# Altium PCB Redstone.PcbDoc
Units mm, origin at the board's own origin, x right, y up, seen from the top; angles counter-clockwise.
Board outline 35 x 35 mm, 2 copper layers (Top Layer, Bottom Layer), stack 1.571 mm thick; 51 components, 32 nets, 206 pads, 0 vias.
Unrouted connection lines stored in the file: 119.
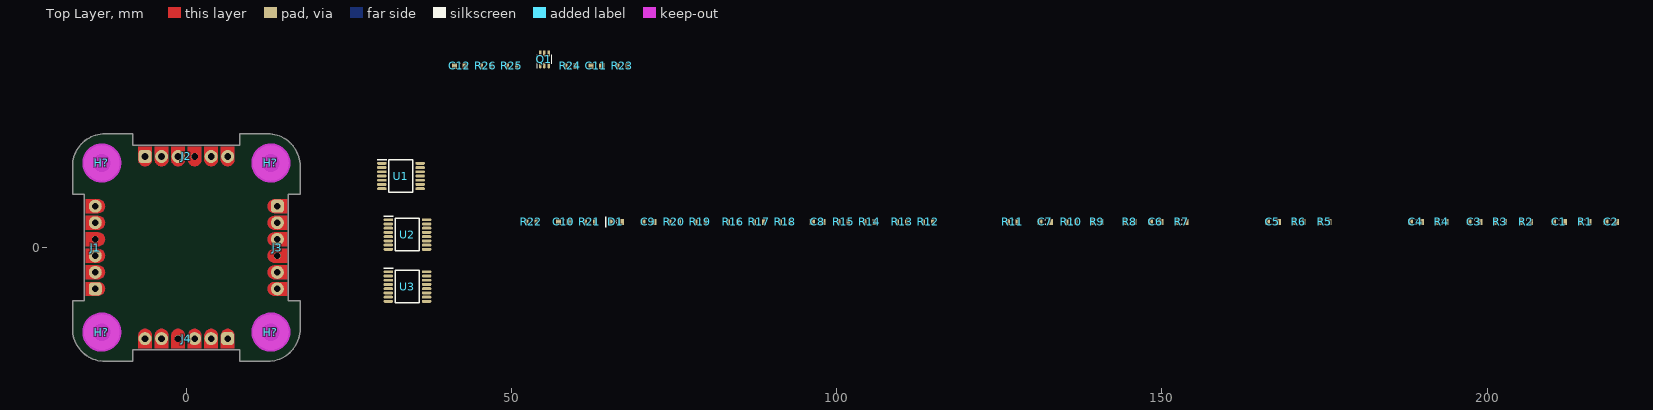
[diagram p0: Top Layer view]
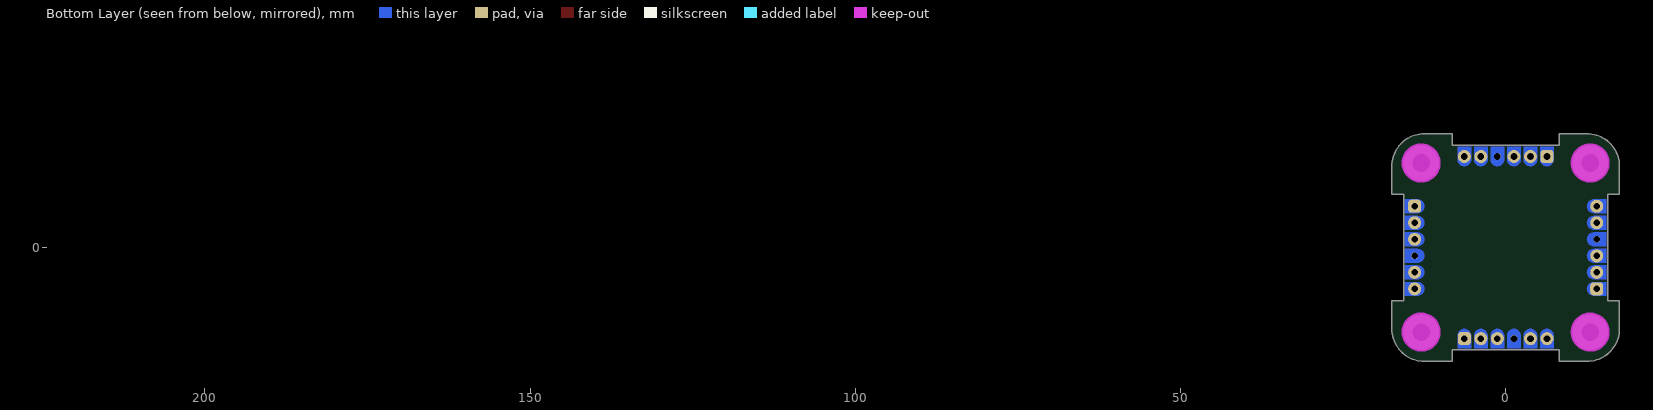
[diagram p1: Bottom Layer view, seen from below]

## Layer stack, top to bottom
Top Solder: solder mask 0.0102, Solder Resist, Dk 3.5
Top Layer: signal copper 0.0356
Dielectric 1: dielectric 1.5, FR-4, Dk 4.8
Bottom Layer: signal copper 0.0356
Bottom Solder: solder mask 0.0102, Solder Resist, Dk 3.5

## Board outline
-17.5,-12.5 ccw(c-12.5,-12.5) -12.5,-17.5 -8.2,-17.5 -8.2,-15.7 8.2,-15.7 8.2,-17.5 12.5,-17.5 ccw(c12.5,-12.5) 17.5,-12.5 17.5,-8.2 15.7,-8.2 15.7,8.2 17.5,8.2 17.5,12.5 ccw(c12.5,12.5) 12.5,17.5 8.2,17.5 8.2,15.7 -8.2,15.7 -8.2,17.5 -12.5,17.5 ccw(c-12.5,12.5) -17.5,12.5 -17.5,8.2 -15.7,8.2 -15.7,-8.2 -17.5,-8.2

## Design rules (kind name [scope] priority, off if disabled: settings)
AcuteAngle [All] p1: minimum=4.50000000000000E+0001 checktracksonly=FALSE
BoardOutlineClearance [All] p1: gap=0.2 ignorepadtopadclearanceinfootprint=FALSE except(0: Arc-SplitContinuation Track-SplitContinuation SMDPad-SplitContinuation THPad-SplitContinuation Via-SplitContinuation Fill-SplitContinuation Poly-SplitContinuation Region-SplitContinuation Text-SplitContinuation)
Clearance [All] p1: gap=0.254 ignorepadtopadclearanceinfootprint=FALSE except(0: Arc-Hole Track-Hole SMDPad-Hole THPad-Hole Via-Hole Fill-Hole Poly-Hole Region-Hole Text-Hole; 0.09: Arc-Arc Arc-Track Track-Track; 0.1: Arc-SMDPad Arc-Text Track-SMDPad Track-Text SMDPad-Text THPad-THPad THPad-Text Via-Text Fill-Text Poly-Text Region-Text Text-Text; 0.127: SMDPad-SMDPad SMDPad-Via; 0.15: Arc-Via Track-Via THPad-Via; 0.2: Arc-THPad Track-THPad SMDPad-THPad)
DiffPairsRouting 0,1 [All] p1: maxlimit=0.127 minlimit=0.127 mostfreqgap=0.127 toplayer_minwidth=0.123 toplayer_maxwidth=0.123 toplayer_prefwidth=0.123 bottomlayer_minwidth=0.123 bottomlayer_maxwidth=0.123 bottomlayer_prefwidth=0.123 impedanceprofiledriven=TRUE maxuncoupledlength=12.7
HoleSize [All] p1: absolutevalues=TRUE maxlimit=6.3 minlimit=0.1 maxpercent=80.000 minpercent=20.000
HoleToHoleClearance [All] p1: gap=0.5 allowstackedmicrovias=TRUE
MinimumAnnularRing [All] p1: minimumring=0.05
MinimumSolderMaskSliver [All] p1: minsoldermaskwidth=0.2
PlaneConnect [All] p1: planeconnectstyle=Direct reliefexpansion=0.508 reliefentries=4 reliefconductorwidth=0.254 reliefairgap=0.254
PolygonConnect PolygonConnectNoThermal [Name Like '*_NOTR'] p1: connectstyle=Direct reliefconductorwidth=0.254 reliefentries=4 polygonreliefangle="90 Angle" airgapwidth=0.254
PolygonConnect [All] p2: thpad.connectstyle=Relief thpad.reliefconductorwidth=0.254 thpad.reliefentries=4 thpad.polygonreliefangle="90 Angle" thpad.airgapwidth=0.254 smdpad.connectstyle=Relief smdpad.reliefconductorwidth=0.254 smdpad.reliefentries=4 smdpad.polygonreliefangle="90 Angle" smdpad.airgapwidth=0.254 via.connectstyle=Direct via.reliefconductorwidth=0.254 via.reliefentries=4 via.polygonreliefangle="90 Angle" via.airgapwidth=0.254
RoutingVias [All] p1: holewidth=0.15 width=0.25 viastyle="Through Hole" minholewidth=0.1 minwidth=0.2 maxholewidth=6.3 maxwidth=6.4
SolderMaskExpansion [IsVia] p1: expansion=0.102 istentingtop=TRUE
SupplyNets "Schematic Supply Nets_2" [InNet('5V')] p1: voltage=0.000
SupplyNets "Schematic Supply Nets_1" [InNet('VCC')] p2: voltage=0.000
SupplyNets "Schematic Supply Nets" [InNet('GND')] p3: voltage=0.000
UnRoutedNet [All] p1: checkbadconnections=TRUE
Width [All] p1: maxlimit=6.3 minlimit=0.1 preferedwidth=0.5
24 further rules are at their usual default settings.

## Classes and differential pairs
component class Redstone: C1 C2 C3 C4 C5 C6 C7 C8 C9 C10 C11 C12 D1 H? J1 J2 J3 J4 Q1 R1 R2 R3 R4 R5 R6 R7 R8 R9 R10 R11 R12 R13 R14 R15 R16 R17 R18 R19 R20 R21 R22 R23 R24 R25 R26 U1 U2 U3

## Components (designator, comment, footprint, x,y, rotation, side; value= is the part's Value field where it differs from the comment)
C1 "1uF" CAP0603 211.055,3.93 r0 top
C2 "100nF" CAP0603 219.055,3.93 r0 top
C3 "100nF" CAP0603 198.055,3.93 r0 top
C4 "100nF" CAP0603 189.055,3.93 r0 top
C5 "100nF" CAP0603 167.055,3.93 r0 top
C6 "1uF" CAP0603 149.055,3.93 r0 top
C7 "100nF" CAP0603 132.055,3.93 r0 top
C8 "1uF" CAP0603 97.055,3.93 r0 top
C9 "100nF" CAP0603 71.055,3.93 r0 top
C10 "1uF" CAP0603 58.055,3.93 r0 top
C11 "100nF" CAP0603 63.055,27.93 r0 top
C12 "100nF" CAP0603 42.055,27.93 r0 top
D1 "LTST-C190KRKT" LED0603 66.055,3.93 r0 top
H? "MH" MOUNTING_HOLE_M2.5 13,13 r0 top
H? "MH" MOUNTING_HOLE_M2.5 13,-13 r0 top
H? "MH" MOUNTING_HOLE_M2.5 -13,13 r0 top
H? "MH" MOUNTING_HOLE_M2.5 -13,-13 r0 top
J1 "Connector" CONNECTOR -14,0 r90 top
J2 "Connector" CONNECTOR 0,14 r0 top
J3 "Connector" CONNECTOR 14,0 r270 top
J4 "Connector" CONNECTOR 0,-14 r180 top
Q1 "SSM6N7002" SOT-363-6 55.055,28.93 r0 top
R1 "100R" RES0603 215.055,3.93 r0 top
R2 "100R" RES0603 206.055,3.93 r0 top
R3 "100K" RES0603 202.055,3.93 r0 top
R4 "240K" RES0603 193.055,3.93 r0 top
R5 "100K" RES0603 175.055,3.93 r0 top
R6 "10K" RES0603 171.055,3.93 r0 top
R7 "100R" RES0603 153.055,3.93 r0 top
R8 "100R" RES0603 145.055,3.93 r0 top
R9 "10K" RES0603 140.055,3.93 r0 top
R10 "100K" RES0603 136.055,3.93 r0 top
R11 "100K" RES0603 127.055,3.93 r0 top
R12 "10K" RES0603 114.055,3.93 r0 top
R13 "10K" RES0603 110.055,3.93 r0 top
R14 "10K" RES0603 105.055,3.93 r0 top
R15 "100R" RES0603 101.055,3.93 r0 top
R16 "100R" RES0603 84.055,3.93 r0 top
R17 "10K" RES0603 88.055,3.93 r0 top
R18 "10K" RES0603 92.055,3.93 r0 top
R19 "100K" RES0603 79.055,3.93 r0 top
R20 "100K" RES0603 75.055,3.93 r0 top
R21 "100R" RES0603 62.055,3.93 r0 top
R22 "100R" RES0603 53.055,3.93 r0 top
R23 "100K" RES0603 67.055,27.93 r0 top
R24 "1K" RES0603 59.055,27.93 r0 top
R25 "510K" RES0603 50.055,27.93 r0 top
R26 "10K" RES0603 46.055,27.93 r0 top
U1 "LM324B" TSSOP_14P 33,11 r0 top
U2 "74HC4053" TSSOP_16P 34,2 r0 top
U3 "LM339B" TSSOP_16P 34,-6 r0 top

## Footprints (in the part's own frame and the unit in brackets; to place one, negate y for a bottom-side part, rotate by r counter-clockwise, add the part's x,y. Pads: shape width x height; smd on the part's side, far side on the other; paste and mask are expansions set on the pad)
CAP0603 [mm] "Chip Capacitor, 2-Leads, Body 1,60x0,80mm, IPC Medium Density"
  rect 0.8x0.95 smd: 1(-0.825,0) 2(0.825,0)
  silkscreen extent -0.05,-0.38 0.05,0.38, body extent -0.8,-0.4 0.8,0.4, height 0.8
CONNECTOR [mil]
  rrect50% 78.74x78.74 hole 40.16 mask+0: 1(-250,0)
  round 1 smd: 1(-250,0) 2(-150,0) 3(-50,0) 4(50,0) 5(150,0) 6(250,0)
  round 1 smd far side: 1(-250,0) 2(-150,0) 3(-50,0) 4(50,0) 5(150,0) 6(250,0)
  round 78.74 hole 40.16 mask+0: 2(-150,0) 3(-50,0) 5(150,0) 6(250,0)
  round 41.16 hole 40.16 mask+0: 4(50,0)
  Top Layer region: 50,-39.37 34.93,-36.37 22.16,-27.84 13.63,-15.07 10.63,0 10.63,0 13.63,15.07 22.16,27.84 34.93,36.37 50,39.37 50,39.37 65.07,36.37 77.84,27.84 86.37,15.07 89.37,0 89.37,0 86.37,-15.07 77.84,-27.84 65.07,-36.37 50,-39.37
  Top Layer region: -250,-59.06 -265.82,-55.91 -279.23,-46.95 -288.19,-33.54 -291.34,-17.72 -291.34,-17.72 -291.34,59.06 -208.66,59.06 -208.66,-17.72 -211.81,-33.54 -220.77,-46.95 -234.18,-55.91 -250,-59.06
  Top Layer region: -150,-59.06 -165.82,-55.91 -179.23,-46.95 -188.19,-33.54 -191.34,-17.72 -191.34,-17.72 -191.34,59.06 -108.66,59.06 -108.66,-17.72 -111.81,-33.54 -120.77,-46.95 -134.18,-55.91 -150,-59.06
  Top Layer region: -50,-59.06 -65.82,-55.91 -79.23,-46.95 -88.19,-33.54 -91.34,-17.72 -91.34,-17.72 -91.34,59.06 -8.66,59.06 -8.66,-17.72 -11.81,-33.54 -20.77,-46.95 -34.18,-55.91 -50,-59.06
  Top Layer region: 50,-59.06 34.18,-55.91 20.77,-46.95 11.81,-33.54 8.66,-17.72 8.66,-17.72 8.66,59.06 91.34,59.06 91.34,-17.72 88.19,-33.54 79.23,-46.95 65.82,-55.91 50,-59.06
  Top Layer region: 150,-59.06 134.18,-55.91 120.77,-46.95 111.81,-33.54 108.66,-17.72 108.66,-17.72 108.66,59.06 191.34,59.06 191.34,-17.72 188.19,-33.54 179.23,-46.95 165.82,-55.91 150,-59.06
  Top Layer region: 250,-59.06 234.18,-55.91 220.77,-46.95 211.81,-33.54 208.66,-17.72 208.66,-17.72 208.66,59.06 291.34,59.06 291.34,-17.72 288.19,-33.54 279.23,-46.95 265.82,-55.91 250,-59.06
  Bottom Layer region: 50,-39.37 34.93,-36.37 22.16,-27.84 13.63,-15.07 10.63,0 10.63,0 13.63,15.07 22.16,27.84 34.93,36.37 50,39.37 50,39.37 65.07,36.37 77.84,27.84 86.37,15.07 89.37,0 89.37,0 86.37,-15.07 77.84,-27.84 65.07,-36.37 50,-39.37
  Bottom Layer region: -250,-59.06 -234.18,-55.91 -220.77,-46.95 -211.81,-33.54 -208.66,-17.72 -208.66,-17.72 -208.66,59.06 -291.34,59.06 -291.34,-17.72 -288.19,-33.54 -279.23,-46.95 -265.82,-55.91 -250,-59.06
  Bottom Layer region: -150,-59.06 -134.18,-55.91 -120.77,-46.95 -111.81,-33.54 -108.66,-17.72 -108.66,-17.72 -108.66,59.06 -191.34,59.06 -191.34,-17.72 -188.19,-33.54 -179.23,-46.95 -165.82,-55.91 -150,-59.06
  Bottom Layer region: -50,-59.06 -34.18,-55.91 -20.77,-46.95 -11.81,-33.54 -8.66,-17.72 -8.66,-17.72 -8.66,59.06 -91.34,59.06 -91.34,-17.72 -88.19,-33.54 -79.23,-46.95 -65.82,-55.91 -50,-59.06
  Bottom Layer region: 50,-59.06 65.82,-55.91 79.23,-46.95 88.19,-33.54 91.34,-17.72 91.34,-17.72 91.34,59.06 8.66,59.06 8.66,-17.72 11.81,-33.54 20.77,-46.95 34.18,-55.91 50,-59.06
  Bottom Layer region: 150,-59.06 165.82,-55.91 179.23,-46.95 188.19,-33.54 191.34,-17.72 191.34,-17.72 191.34,59.06 108.66,59.06 108.66,-17.72 111.81,-33.54 120.77,-46.95 134.18,-55.91 150,-59.06
  Bottom Layer region: 250,-59.06 265.82,-55.91 279.23,-46.95 288.19,-33.54 291.34,-17.72 291.34,-17.72 291.34,59.06 208.66,59.06 208.66,-17.72 211.81,-33.54 220.77,-46.95 234.18,-55.91 250,-59.06
  body extent -394,63 394,327, height 126
LED0603 [mm]
  rect 0.9x0.95 smd: A(0.8,0) C(-0.8,0)
  silkscreen extent -1.6,-0.82 0.14,0.82, body extent -0.83,-0.4 0.77,0.4, height 0.8
MOUNTING_HOLE_M2.5 [mm] "Mounting hole for M2.5 screws."
  round 5.5 hole 2.7: MH(0,0)
  Keep-Out Layer circle w3: c0,0 r1.5
RES0603 [mm] "Chip Resistor, 2-Leads, Body 1,55x0,85mm, IPC Medium Density"
  rect 0.55x0.9 smd: 1(-0.725,0) 2(0.725,0)
  silkscreen extent -0.05,-0.35 0.05,0.35, body extent -0.77,-0.43 0.77,0.43, height 0.45
SOT-363-6 [mm] "Small Outline Transistor (SOT23), 0.65 mm pitch; 6 pin, 2.00 mm L X 1.25 mm W X 1.10 mm H body"
  rrect51% 0.39x0.89 smd: 1(-0.65,-0.92) 2(0,-0.92) 3(0.65,-0.92) 4(0.65,0.92) 5(0,0.92) 6(-0.65,0.92)
  silkscreen extent -1.1,-1.4 1.1,0.68, body extent -1,-1.05 1,1.05, height 1.1
TSSOP_14P [mm]
  oval 1.475x0.45 smd: 1(-2.938,1.95) 2(-2.938,1.3) 3(-2.938,0.65) 4(-2.938,0) 5(-2.938,-0.65) 6(-2.938,-1.3) 7(-2.938,-1.95) 8(2.938,-1.95) 9(2.938,-1.3) 10(2.938,-0.65) 11(2.938,0) 12(2.938,0.65) 13(2.938,1.3) 14(2.938,1.95)
  silkscreen extent -3.67,-2.5 1.85,2.52, body extent -3.2,-2.5 3.2,2.5, height 1.13
TSSOP_16P [mm]
  oval 1.475x0.45 smd: 1(-2.938,2.275) 2(-2.938,1.625) 3(-2.938,0.975) 4(-2.938,0.325) 5(-2.938,-0.325) 6(-2.938,-0.975) 7(-2.938,-1.625) 8(-2.938,-2.275) 9(2.938,-2.275) 10(2.938,-1.625) 11(2.938,-0.975) 12(2.938,-0.325) 13(2.938,0.325) 14(2.938,0.975) 15(2.938,1.625) 16(2.938,2.275)
  silkscreen extent -3.67,-2.5 1.85,2.85, body extent -3.21,-2.5 3.21,2.5, height 0.98

## Part data
C1 C2 C3 C4 C5 C6 C7 C8 C9 C10 C11 C12: library part Capacitor
D1: Supplier Part Number=859-LTST-C190KRKT, Supplier=Mouser
H? H? H? H?: library part MountingHole
Q1: library part SSM6N7002KFULF, Supplier Part Number=757-SSM6N7002KFULF, Supplier=Mouser
R1 R2 R3 R4 R5 R6 R7 R8 R9 R10 R11 R12 R13 R14 R15 R16 R17 R18 R19 R20 R21 R22 R23 R24 R25 R26: library part Resistor
U1: library part LM324BIPWR, Supplier Part Number=595-LM324BIPWR, Supplier=Mouser
U2: library part 74HC4053PW,118, Supplier Part Number=771-74HC4053PW-T, Supplier=Mouser
U3: library part LM339BIPWR, Supplier Part Number=595-LM339BIPWR, Supplier=Mouser

## Nets (pads, with @x,y where several pads share a name; then routed paths per layer and width w, separated by ;. In a path a pad name is that pad's centre, name@x,y a point inside that pad or via, vN(x,y) a via of type N, cw(c..) or ccw(c..) an arc to the next point about the centre after c; other vN are vias at no path point)
5V: C1.1 C2.1 C4.1 C6.1 C8.1 C10.1 D1.A J1.1 J1.6 J2.1 J2.6 J3.1 J3.6 J4.1 J4.6 R4.2 R5.1 R11.1 R20.1 R25.2 U1.4 U2.16 U3.3
COMP1: U2.5 U2.14 U3.9
COMP2: U2.3 U2.15 U3.8
GND: C1.2 C2.2 C3.2 C4.2 C5.2 C6.2 C7.2 C8.2 C9.2 C10.2 C11.2 C12.2 J1.2 J1.5 J2.2 J2.5 J3.2 J3.5 J4.2 J4.5 Q1.4 R3.2 R6.1 R10.2 R14.1 R17.2 R18.1 R19.2 R23.2 R26.1 U1.11 U2.7 U2.8 U3.12
IN1: C3.1 R2.2 R3.1 U2.12 U3.7
IN1_CN: J1.3 R2.1
IN2: C7.1 R8.2 R10.1 U2.13 U3.6
IN2_CN: J2.3 R8.1
IN3: C9.1 R16.2 R19.1 U2.2 U3.5
IN3_CN: J3.3 R16.1
IN4: C11.1 R22.2 R23.1 U2.1 U3.4
IN4_CN: J4.3 R22.1
MAX: U1.3 U1.12 U2.4 U3.11
MAX_DIFF: R13.2 R17.1 U1.1 U1.2
NetC5_1: C5.1 R4.1 R6.2 U1.10
NetC12_1: C12.1 R25.1 R26.2 U3.10
NetD1_C: D1.C Q1.3
NetQ1_1: Q1.1 R24.2 U1.13
NetQ1_2: Q1.2 U1.14
NetQ1_5: Q1.5 U3.13
NetQ1_6: Q1.6 R24.1
NetR5_2: R5.2 U2.11 U3.1
NetR9_2: R9.2 R12.1 U1.6
NetR11_2: R11.2 U2.10 U3.2
NetR13_1: R13.1 R18.2 U1.5
NetR20_2: R20.2 U2.9 U3.14
OUT: R1.2 R7.2 R9.1 R14.2 R15.2 R21.2 U1.7
OUT1_CN: J1.4 R1.1
OUT2_CN: J2.4 R7.1
OUT3_CN: J3.4 R15.1
OUT4_CN: J4.4 R21.1
VREF: R12.2 U1.8 U1.9
pads on no net: H?.MH U2.6 U3.15 U3.16

## Silkscreen, mask and mechanical layers (free items; w line width, h text height)
Mechanical 1:
  the board outline again, w0.2